# Altium PCB test.PcbDoc
Units mil, origin at the board's own origin, x right, y up, seen from the top; angles counter-clockwise.
Board outline 4300 x 3300 mil, 2 copper layers (Top Layer, Bottom Layer); 29 components, 76 nets, 195 pads, 29 vias.
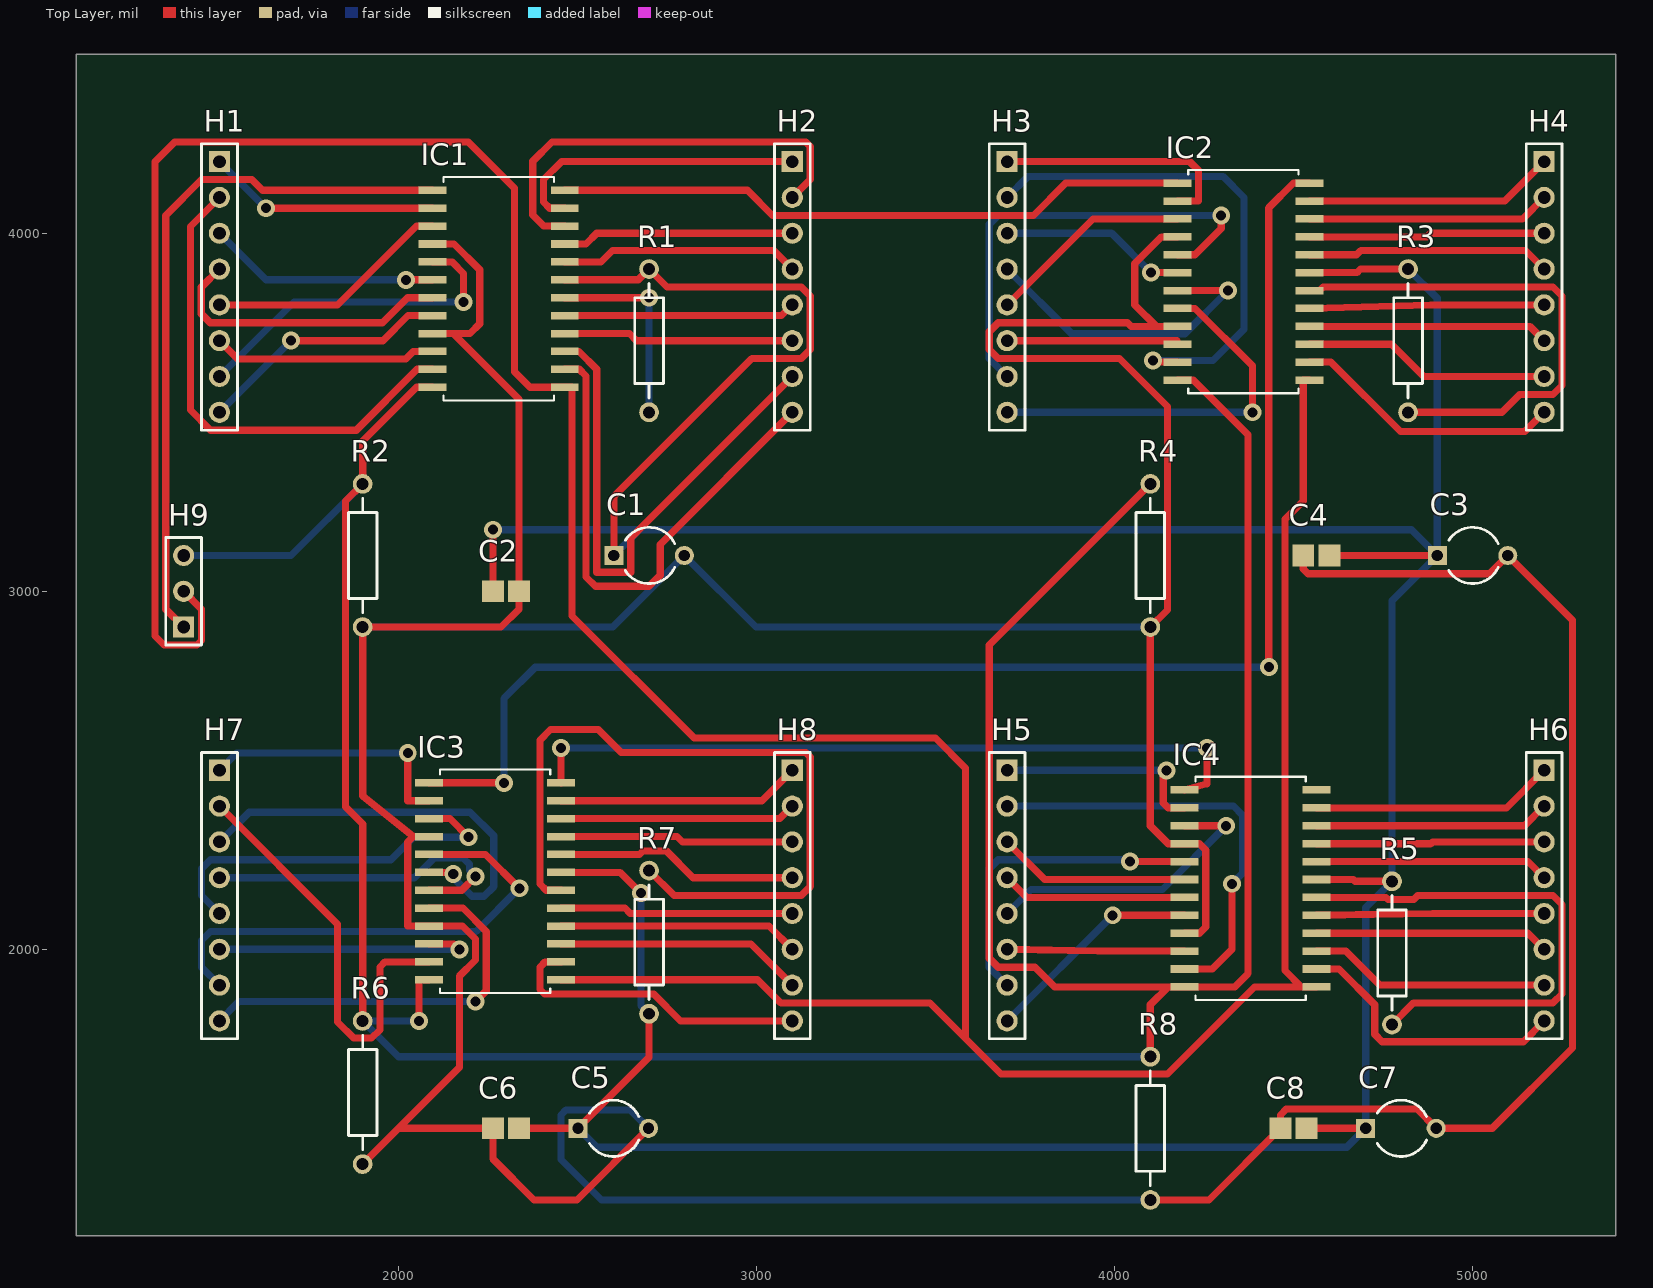
[diagram p0: Top Layer view]
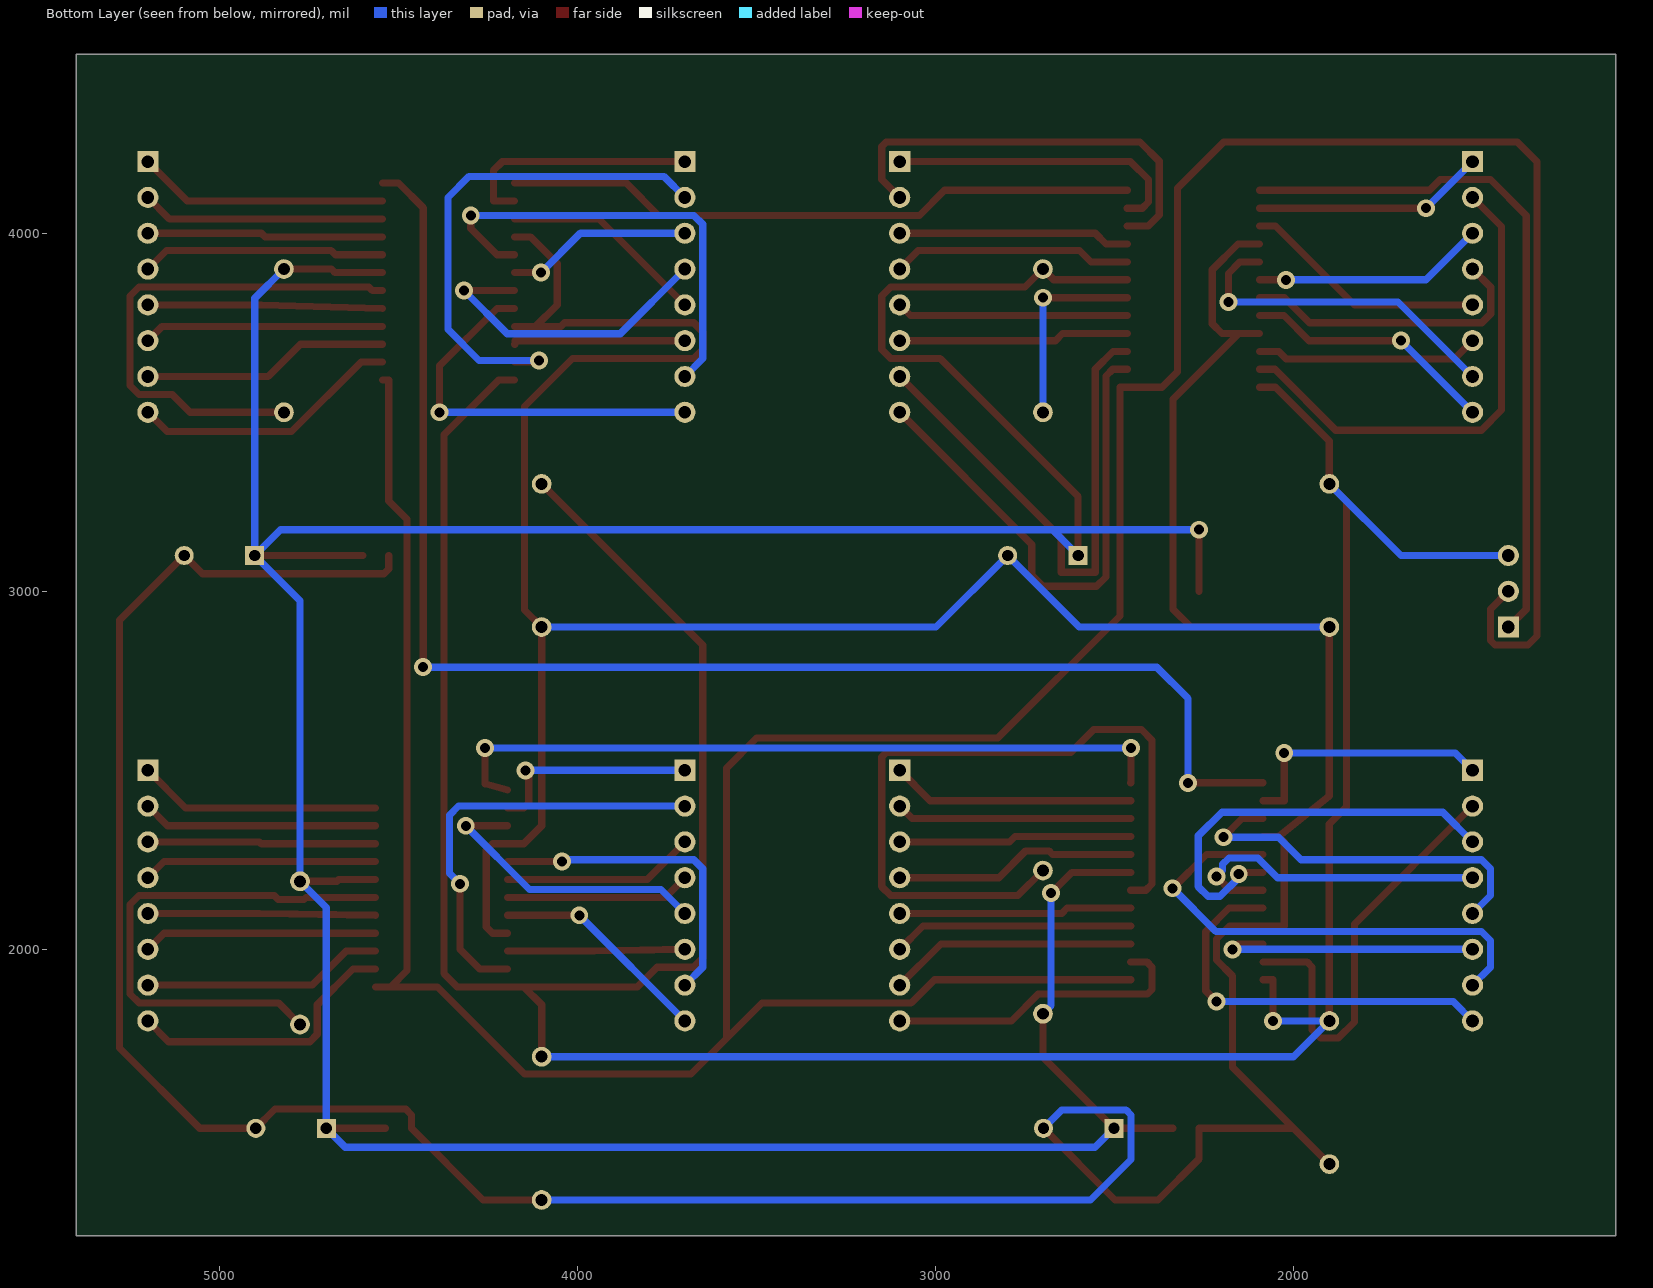
[diagram p1: Bottom Layer view, seen from below]

## Layer stack, top to bottom
Top Solder: solder mask 0.4, Solder Resist, Dk 3.5
Top Layer: signal copper 1.4
Dielectric 1: dielectric 12.6, FR-4, Dk 4.8
Bottom Layer: signal copper 1.4
Bottom Solder: solder mask 0.4, Solder Resist, Dk 3.5

## Board outline
1100,1200 5400,1200 5400,4500 1100,4500

## Design rules (kind name [scope] priority, off if disabled: settings)
Clearance [All] p1: gap=10 ignorepadtopadclearanceinfootprint=FALSE except(0: Arc-Hole Track-Hole SMDPad-Hole THPad-Hole Via-Hole Fill-Hole Poly-Hole Region-Hole Text-Hole)
PolygonConnect [All] p1: connectstyle=Relief reliefconductorwidth=10 reliefentries=4 polygonreliefangle="90 Angle" airgapwidth=10
RoutingVias [All] p1: holewidth=28 width=50 viastyle="Through Hole" minholewidth=28 minwidth=50 maxholewidth=28 maxwidth=50
SolderMaskExpansion [All] p1: expansion=4 istentingtop=FALSE
Width [All] p1: maxlimit=20 minlimit=15 preferedwidth=20 minimp=50.000000 maximp=50.000000 favimp=50.000000
30 further rules are at their usual default settings.

## Components (designator, comment, footprint, x,y, rotation, side; value= is the part's Value field where it differs from the comment)
C1 "Cap2" CAPR5-4X5 2700,3100 r0 top value=10µF
C2 "0.1µF" CAPC2013X94X50ML20T25 2300,3000 r0 top
C3 "Cap2" CAPR5-4X5 5000,3100 r0 top value=10µF
C4 "0.1µF" CAPC2013X94X50ML20T25 4563.58,3100 r0 top
C5 "Cap2" CAPR5-4X5 2600,1500 r0 top value=10µF
C6 "0.1µF" CAPC2013X94X50ML20T25 2300,1500 r0 top
C7 "Cap2" CAPR5-4X5 4800,1500 r0 top value=10µF
C8 "0.1µF" CAPC2013X94X50ML20T25 4500,1500 r0 top
H1 "Header 8" HDR1X8 1500,4200 r270 top
H2 "Header 8" HDR1X8 3100,4200 r270 top
H3 "Header 8" HDR1X8 3700,4200 r270 top
H4 "Header 8" HDR1X8 5200,4200 r270 top
H5 "Header 8" HDR1X8 3700,2500 r270 top
H6 "Header 8" HDR1X8 5200,2500 r270 top
H7 "Header 8" HDR1X8 1500,2500 r270 top
H8 "Header 8" HDR1X8 3100,2500 r270 top
H9 "Header 3" HDR1X3 1400,2900 r90 top
IC1 "MAX" *21-0042B_24 2280,3845 r0 top
IC2 "MAX" *21-0042B_24 4360,3865 r0 top
IC3 "MAX" *21-0042B_24 2270,2190 r0 top
IC4 "MAX" *21-0042B_24 4380,2170 r0 top
R1 "Res2" AXIAL-0.4 2700,3700 r90 top value=27K
R2 "Res2" AXIAL-0.4 1900,3100 r90 top value=10K
R3 "Res2" AXIAL-0.4 4820,3700 r90 top value=27K
R4 "Res2" AXIAL-0.4 4100,3100 r90 top value=10K
R5 "Res2" AXIAL-0.4 4775,1990 r90 top value=27K
R6 "Res2" AXIAL-0.4 1900,1600 r90 top value=10K
R7 "Res2" AXIAL-0.4 2700,2020 r90 top value=27K
R8 "Res2" AXIAL-0.4 4100,1500 r90 top value=10K

## Footprints (in the part's own frame and the unit in brackets; to place one, negate y for a bottom-side part, rotate by r counter-clockwise, add the part's x,y. Pads: shape width x height; smd on the part's side, far side on the other; paste and mask are expansions set on the pad)
*21-0042B_24 [mil]
  rect 78x21 smd: 1(-184.5,275) 2(-184.5,225) 3(-184.5,175) 4(-184.5,125) 5(-184.5,75) 6(-184.5,25) 7(-184.5,-25) 8(-184.5,-75) 9(-184.5,-125) 10(-184.5,-175) 11(-184.5,-225) 12(-184.5,-275) 13(184.5,-275) 14(184.5,-225) 15(184.5,-175) 16(184.5,-125) 17(184.5,-75) 18(184.5,-25) 19(184.5,25) 20(184.5,75) 21(184.5,125) 22(184.5,175) 23(184.5,225) 24(184.5,275)
  silkscreen extent -154,-312 154,312
AXIAL-0.4 [mm] "Axial Device, Thru-Hole; 2 Leads; 0.4 in Pin Spacing"
  round 1.4 hole 0.85: 1(-5.08,0) 2(5.08,0)
  silkscreen extent -4.06,-1.02 4.06,1.02
CAPC2013X94X50ML20T25 [mm] "Chip Capacitor, 2-Leads, Body 2.01x1.25mm, IPC Low Density"
  rect 1.55x1.55 smd: 1(-0.925,0) 2(0.925,0)
  body extent -1.1,-0.72 1.11,0.72, height 0.94
CAPR5-4X5 [mm] "Capacitor; 2 Leads"
  rect 1.35x1.35 hole 0.8: 1(-2.5,0)
  round 1.35 hole 0.8: 2(2.5,0)
  silkscreen extent -1.69,-2 1.82,2
HDR1X3 [mm] "Connector; Header; 3 Position"
  rect 1.5x1.5 hole 0.9: 1(0,0)
  round 1.5 hole 0.9: 2(2.54,0) 3(5.08,0)
  silkscreen extent -1.27,-1.27 6.35,1.27
HDR1X8 [mm] "Connector; Header; 8 Position"
  rect 1.5x1.5 hole 0.9: 1(0,0)
  round 1.5 hole 0.9: 2(2.54,0) 3(5.08,0) 4(7.62,0) 5(10.16,0) 6(12.7,0) 7(15.24,0) 8(17.78,0)
  silkscreen extent -1.27,-1.27 19.05,1.27

## Part data
C1 C3 C5 C7: "Capacitor", PackageDescription="Capacitor; 2 Leads", PackageReference=CAPR5-4X5, Published=23-Sep-2002, Publisher="Altium Limited"
C2 C4 C6 C8: library part CMP-2000-05016-1, "Chip Capacitor, Ceramic, 0.1 uF, 10%, 50 V, 0805, RoHS, Tape and Reel", Capacitance=100nF, Case Size/Dimension=0805, Dielectric=X7R, Manufacturer=AVX, Rated Voltage=50V, Tolerance (%)=±10%, Datasheet URL=http://www.farnell.com/datasheets/319609.pdf, Datasheet Version=Sep-07, Manufacturer URL=http://www.avx.com/
H1 H2 H3 H4 H5 H6 H7 H8: "Header, 8-Pin", LatestRevisionDate=17-Jul-2002, LatestRevisionNote="Re-released for DXP Platform.", Publisher="Altium Limited"
H9: "Header, 3-Pin", LatestRevisionDate=17-Jul-2002, LatestRevisionNote="Re-released for DXP Platform.", Publisher="Altium Limited"
R1 R2 R3 R4 R5 R6 R7 R8: "Resistor", LatestRevisionDate=17-Jul-2002, LatestRevisionNote="Re-released for DXP Platform.", PackageDescription="Axial Device, Thru-Hole; 2 Leads; 0.4 in Pin Spacing", PackageReference=AXIAL-0.4, Published=8-Jun-2000, Publisher="Altium Limited"

## Via types
v1: diameter 50, hole 28, Top Layer to Bottom Layer, 29 vias

## Nets (pads, with @x,y where several pads share a name; then routed paths per layer and width w, separated by ;. In a path a pad name is that pad's centre, name@x,y a point inside that pad or via, vN(x,y) a via of type N, cw(c..) or ccw(c..) an arc to the next point about the centre after c; other vN are vias at no path point)
+5: C1.1 C2.1 C3.1 C4.2 C5.1 C6.2 C7.1 C8.2 IC1.19 IC2.19 IC3.19 IC4.19 R1.2 R3.2 R5.2 R7.1 | length 11583.3
  Top Layer w20: C2.1 v1(2263.58,3172) ; C6.2 C5.1 2700,1698.43 R7.1 ; IC3.19 2619,2215 v1(2677,2157) ; IC1.19 2670,3870 R1.2 2750,3850 3125,3850 3150,3825 3150,3675 3125,3650 2987,3650 2601.57,3264.57 C1.1 ; C8.2 C7.1 ; IC2.19 4677,3890 4687,3900 R3.2 ; IC4.19 4667,2195 4672,2190 R5.2 ; C4.2 C3.1
  Bottom Layer w20: v1(2263.58,3172) 2673.57,3172 ; C5.1 2554.31,1447.26 4648.84,1447.26 C7.1 4701.57,2116.57 R5.2 4775,2973.43 C3.1 ; C1.1 2673.57,3172 ; v1(2677,2157) 2677,1843 R7.1 ; R3.2 4901.57,3818.43 C3.1 ; 2673.57,3172 4829.57,3172 C3.1
GND: C1.2 C2.2 C3.2 C4.1 C5.2 C6.1 C7.2 C8.1 IC1.4 IC1.9 IC2.4 IC2.9 IC3.4 IC3.9 IC4.4 IC4.9 R2.1 R4.1 R6.1 R8.1 | length 15710.5
  Top Layer w20: R6.1 2000,1500 ; IC3.4 2041,2315 ; IC1.9 2153,3720 ; IC1.4 2155,3970 2227,3898 2227,3747 2200,3720 2153,3720 ; C5.2 2498.43,1300 2378.43,1300 2263.58,1414.84 C6.1 2000,1500 ; R8.1 4263.58,1300 C8.1 4463.58,1537.5 4479.66,1553.58 4844.84,1553.58 C7.2 5055,1500 5279.53,1724.53 5279.53,2918.9 C3.2 5047.43,3049 4540.5,3049 4527.17,3062.33 C4.1 ; IC2.9 4116.5,3740 ; IC2.4 4131,3990 4056.5,3915.5 4056.5,3800 4116.5,3740 ; IC4.9 4237.5,2045 4255,2062.5 4255,2277.5 4237.5,2295 IC4.4 4150,2295 4100,2345 R4.1 4148,2948 4148,3516 4014,3650 3675,3650 3650,3675 3650,3725 3675,3750 4036,3750 4046,3740 4116.5,3740 ; 2000,1500 2170,1670 2170,1925 2215,1970 2215,2029 2179,2065 IC3.9 2026,2065 2026,2300 2041,2315 ; 2041,2315 1900,2428 R2.1 2286.42,2900 2336.42,2950 C2.2 2336.42,3536.58 2153,3720
  Bottom Layer w20: R2.1 2598.43,2900 C1.2 2998.43,2900 R4.1 ; C5.2 2647.43,1551 2467.5,1551 2454,1537.5 2454,1413 2567,1300 R8.1
NetH2_1: H2.1 IC1.23 | length 845
  Top Layer w20: IC1.23 2422.5,4070 2405,4087.5 2405,4150 2455,4200 H2.1
NetH2_2: H2.2 IC1.22 | length 1218.1
  Top Layer w20: IC1.22 2406,4020 2375,4051 2375,4201 2429,4255 3137.5,4255 3150,4242.5 3150,4150 H2.2
NetH2_3: H2.3 IC1.21 | length 647.9
  Top Layer w20: IC1.21 2524,3970 2554,4000 H2.3
NetH2_4: H2.4 IC1.20 | length 670.3
  Top Layer w20: IC1.20 2566,3920 2598,3952 3048,3952 H2.4
NetH2_5: H2.5 IC1.17 | length 647.9
  Top Layer w20: IC1.17 3070,3770 H2.5
NetH2_6: H2.6 IC1.16 | length 643.8
  Top Layer w20: IC1.16 2645.2,3720 2665.2,3700 H2.6
NetH2_7: H2.7 IC1.15 | length 1506
  Top Layer w20: IC1.15 2504,3670 2554,3620 2554,3053 2649,3053 2649,3149 H2.7
NetH2_8: H2.8 IC1.14 | length 1466.8
  Top Layer w20: IC1.14 2505,3620 2524,3601 2524,3040 2550,3014 2700,3014 2731,3045 2731,3131 H2.8
NetH4_1: H4.1 IC2.23 | length 701.1
  Top Layer w20: IC2.23 5090,4090 H4.1
NetH4_2: H4.2 IC2.22 | length 680.4
  Top Layer w20: IC2.22 5140,4040 H4.2
NetH4_3: H4.3 IC2.21 | length 659.6
  Top Layer w20: IC2.21 4873,3990 4883,4000 H4.3
NetH4_4: H4.4 IC2.20 | length 682
  Top Layer w20: IC2.20 4676,3940 4688,3952 5148,3952 H4.4
NetH4_5: H4.5 IC2.17 | length 655.6
  Top Layer w20: IC2.17 4883,3800 H4.5
NetH4_6: H4.6 IC2.16 | length 672.1
  Top Layer w20: IC2.16 5160,3740 H4.6
NetH4_7: H4.7 IC2.15 | length 692.8
  Top Layer w20: IC2.15 4774,3690 4864,3600 H4.7
NetH4_8: H4.8 IC2.14 | length 758.2
  Top Layer w20: IC2.14 4605,3640 4799,3446 5146,3446 H4.8
NetH6_1: H6.1 IC4.23 | length 679
  Top Layer w20: IC4.23 5095,2395 H6.1
NetH6_2: H6.2 IC4.22 | length 658.3
  Top Layer w20: IC4.22 5145,2345 H6.2
NetH6_3: H6.3 IC4.21 | length 637.6
  Top Layer w20: IC4.21 4883,2295 4888,2300 H6.3
NetH6_4: H6.4 IC4.20 | length 654.1
  Top Layer w20: IC4.20 5155,2245 H6.4
NetH6_5: H6.5 IC4.17 | length 635.5
  Top Layer w20: IC4.17 4888,2100 H6.5
NetH6_6: H6.6 IC4.16 | length 654.1
  Top Layer w20: IC4.16 5155,2045 H6.6
NetH6_7: H6.7 IC4.15 | length 674.9
  Top Layer w20: IC4.15 4646,1995 4741,1900 H6.7
NetH6_8: H6.8 IC4.14 | length 791.9
  Top Layer w20: IC4.14 4627,1945 4727,1845 4727,1762.5 4747.5,1742 5142,1742 H6.8
NetH8_1: H8.1 IC3.23 | length 680.7
  Top Layer w20: IC3.23 3015,2415 H8.1
NetH8_2: H8.2 IC3.22 | length 660
  Top Layer w20: IC3.22 3065,2365 H8.2
NetH8_3: H8.3 IC3.21 | length 651.7
  Top Layer w20: IC3.21 2778,2315 2793,2300 H8.3
NetH8_4: H8.4 IC3.20 | length 680.7
  Top Layer w20: IC3.20 2673,2265 2683,2275 2748,2275 2823,2200 H8.4
NetH8_5: H8.5 IC3.17 | length 651.7
  Top Layer w20: IC3.17 2632.37,2115 2647.37,2100 H8.5
NetH8_6: H8.6 IC3.16 | length 672.4
  Top Layer w20: IC3.16 3035,2065 H8.6
NetH8_7: H8.7 IC3.15 | length 693.1
  Top Layer w20: IC3.15 2985,2015 H8.7
NetH8_8: H8.8 IC3.14 | length 869.5
  Top Layer w20: IC3.14 2410,1965 2395,1950 2395,1887.5 2407.5,1875 2713,1875 2788,1800 H8.8
NetH9_1: H9.1 IC1.1 | length 1970.1
  Top Layer w20: H9.1 1350,2950 1350,4050 1450,4150 1590,4150 1620,4120 IC1.1
NetH9_2: H9.2 IC1.13 IC2.13 IC3.13 IC4.13 | length 10141.9
  Top Layer w20: H9.2 1450,2950 1450,2862.5 1437.5,2850 1345,2850 1320,2875 1320,4200 1375,4255 2195,4255 2324,4126 2324,3613 2367,3570 IC1.13 2485,3570 2485,2931 2826,2590 3500,2590 3584,2506 3584,1751 ; IC3.13 3003,1915 3068,1850 3485,1850 3584,1751 ; IC2.13 4527,3590 4527,3252 4476,3201 4476,1940.5 4521.5,1895 ; IC4.13 4521.5,1895 ; 3584,1751 3683,1652 4148,1652 4391,1895 4521.5,1895
NetH9_3: H9.3 IC1.12 IC2.12 IC3.12 IC4.12 R2.2 R4.2 R6.2 R8.2 | length 9306.6
  Top Layer w20: R6.2 1900,2350 1852,2398 1852,3252 R2.2 1900,3420 2050,3570 IC1.12 ; v1(2057,1800) 2057,1915 IC3.12 ; R8.2 4100,1845 4150,1895 ; R4.2 3650,2850 3650,1975 3675,1950 3778,1950 3833,1895 4150,1895 ; IC2.12 4220,3590 4373,3437 4373,1932 4336,1895 IC4.12 4150,1895
  Bottom Layer w20: H9.3 1700,3100 R2.2 ; v1(2057,1800) R6.2 2000,1700 R8.2
NetIC1_18: IC1.18 R1.1 | length 555.5
  Top Layer w20: IC1.18 v1(2700,3820)
  Bottom Layer w20: R1.1 v1(2700,3820)
NetIC1_24: IC1.24 IC2.1 | length 1777.3
  Top Layer w20: IC1.24 2975,4120 3045,4050 3774,4050 3864,4140 IC2.1
NetIC2_18: IC2.18 R3.1 | length 1431.1
  Top Layer w20: IC2.18 4573,3840 4583,3850 5225,3850 5250,3825 5250,3575 5225,3550 5132,3550 5082,3500 R3.1
NetIC2_24: IC2.24 IC3.1 | length 4042.6
  Top Layer w20: IC3.1 v1(2295,2465) ; v1(4431,2788) 4431,4071 4500,4140 IC2.24
  Bottom Layer w20: v1(2295,2465) 2295,2701 2382,2788 v1(4431,2788)
NetIC3_18: IC3.18 R7.2 | length 2119.2
  Top Layer w20: IC3.18 2412.5,2165 2395,2182.5 2395,2584 2425,2614 2558,2614 2622,2550 3137.5,2550 3150,2537.5 3150,2175 3125,2150 2770,2150 R7.2
NetIC3_24: IC3.24 IC4.1 | length 2065.9
  Top Layer w20: v1(2454,2562) 2454,2465 IC3.24 ; IC4.1 4258,2462.5 v1(4258,2562)
  Bottom Layer w20: v1(2454,2562) v1(4258,2562)
NetIC4_18: IC4.18 R5.1 | length 1462.2
  Top Layer w20: IC4.18 4758,2145 4764,2139 4836,2139 4847,2150 5224.53,2150 5249.53,2125 5249.53,1875 5225,1850.47 4835.47,1850.47 R5.1
S0: H1.1 IC1.2 | length 649.3
  Top Layer w20: v1(1630,4070) IC1.2
  Bottom Layer w20: H1.1 v1(1630,4070)
S1: H1.5 IC1.3 | length 686.6
  Top Layer w20: H1.5 1830,3800 2050,4020 IC1.3
S2: H1.7 IC1.5 | length 947.9
  Top Layer w20: IC1.5 2150,3920 2182,3888 v1(2182,3808)
  Bottom Layer w20: H1.7 1708,3808 v1(2182,3808)
S3: H1.3 IC1.6 | length 649.3
  Top Layer w20: v1(2021,3870) IC1.6
  Bottom Layer w20: H1.3 1630,3870 v1(2021,3870)
S4: H1.4 IC1.7 | length 832
  Top Layer w20: H1.4 1449,3849 1449,3775 1474,3750 1955,3750 2025,3820 IC1.7
S5: H1.8 IC1.8 | length 707.3
  Top Layer w20: v1(1700,3700) 1957,3700 2027,3770 IC1.8
  Bottom Layer w20: H1.8 v1(1700,3700)
S6: H1.6 IC1.10 | length 625.2
  Top Layer w20: H1.6 1550.81,3649.19 2020.25,3649.19 2041.06,3670 IC1.10
S7: H1.2 IC1.11 | length 1397.7
  Top Layer w20: H1.2 1419,4019 1419,3506 1475,3450 1882,3450 2052,3620 IC1.11
S8: H3.1 IC2.2 | length 689.9
  Top Layer w20: H3.1 4210,4200 4235,4175 4235,4090 IC2.2
S9: H3.5 IC2.3 | length 574.9
  Top Layer w20: H3.5 3940,4040 IC2.3
S10: H3.7 IC2.5 | length 1293.8
  Top Layer w20: IC2.5 4225,3940 4298,4013 v1(4298,4050)
  Bottom Layer w20: H3.7 3650,3650 3650,4025 3675,4050 v1(4298,4050)
S11: H3.3 IC2.6 | length 521.1
  Top Layer w20: v1(4102,3890) IC2.6
  Bottom Layer w20: H3.3 3992,4000 v1(4102,3890)
S12: H3.4 IC2.7 | length 883.4
  Top Layer w20: IC2.7 v1(4317,3840)
  Bottom Layer w20: H3.4 3880.76,3719.24 4196.24,3719.24 v1(4317,3840)
S13: H3.8 IC2.8 | length 1090.8
  Top Layer w20: IC2.8 4225,3790 4385,3630 v1(4385,3500)
  Bottom Layer w20: H3.8 v1(4385,3500)
S14: H3.6 IC2.10 | length 485.5
  Top Layer w20: H3.6 4174.48,3700 4174.48,3690 IC2.10
S15: H3.2 IC2.11 | length 1438.5
  Top Layer w20: v1(4108,3645) 4113,3640 IC2.11
  Bottom Layer w20: H3.2 3759,4159 4303,4159 4362,4100 4362,3732 4275,3645 v1(4108,3645)
S16: H5.1 IC4.2 | length 604.4
  Top Layer w20: v1(4145,2499) 4136,2490 4136,2409 4150,2395 IC4.2
  Bottom Layer w20: H5.1 4144,2500 v1(4145,2499)
S17: H5.5 IC4.3 | length 830
  Top Layer w20: IC4.3 v1(4312,2345)
  Bottom Layer w20: H5.5 3767,2167 4134,2167 v1(4312,2345)
S18: H5.7 IC4.5 | length 903.6
  Top Layer w20: v1(4043,2245) IC4.5
  Bottom Layer w20: H5.7 3650,1950 3650,2225 3675,2250 4038,2250 v1(4043,2245)
S19: H5.3 IC4.6 | length 539
  Top Layer w20: H5.3 3805,2195 IC4.6
S20: H5.4 IC4.7 | length 518.3
  Top Layer w20: H5.4 3755,2145 IC4.7
S21: H5.8 IC4.8 | length 617.7
  Top Layer w20: v1(3995,2095) IC4.8
  Bottom Layer w20: H5.8 v1(3995,2095)
S22: H5.6 IC4.10 | length 495.5
  Top Layer w20: H5.6 3952,1995 IC4.10
S23: H5.2 IC4.11 | length 1209.6
  Top Layer w20: IC4.11 4273,1945 4328,2000 v1(4328,2183)
  Bottom Layer w20: H5.2 4332,2400 4357,2375 4357,2212 v1(4328,2183)
S24: H7.1 IC3.2 | length 738.4
  Top Layer w20: v1(2026,2548) 2026,2415 IC3.2
  Bottom Layer w20: H7.1 1548,2548 v1(2026,2548)
S25: H7.5 IC3.3 | length 1060
  Top Layer w20: IC3.3 2144,2365 v1(2195.9,2313.1)
  Bottom Layer w20: H7.5 1450,2150 1450,2225 1475,2250 1979.1,2250 2042.2,2313.1 v1(2195.9,2313.1)
S26: H7.7 IC3.5 | length 1384.6
  Top Layer w20: IC3.5 2243,2265 v1(2337.5,2170.5)
  Bottom Layer w20: H7.7 1450,1950 1450,2025 1475,2050 2217,2050 v1(2337.5,2170.5)
S27: H7.3 IC3.6 | length 1195
  Top Layer w20: IC3.6 2148,2215 v1(2153,2210)
  Bottom Layer w20: H7.3 1583,2383 2200,2383 2266,2317 2266,2175 2239,2148 2205,2148 2153,2200 v1(2153,2210)
S28: H7.4 IC3.7 | length 914.8
  Top Layer w20: IC3.7 2177,2165 v1(2215,2203)
  Bottom Layer w20: H7.4 2045,2200 2100,2255 2180.5,2255 2198,2237.5 2198,2220 v1(2215,2203)
S29: H7.8 IC3.8 | length 1132.2
  Top Layer w20: IC3.8 2180,2115 2245,2050 2245,1884 v1(2215,1854)
  Bottom Layer w20: H7.8 1554,1854 v1(2215,1854)
S30: H7.6 IC3.10 | length 760.7
  Top Layer w20: IC3.10 2155,2015 v1(2170,2000)
  Bottom Layer w20: H7.6 v1(2170,2000)
S31: H7.2 IC3.11 | length 1204.9
  Top Layer w20: H7.2 1830,2070 1830,1797 1875,1752 1925,1752 1948,1775 1948,1950.5 1962.5,1965 IC3.11
pads on no net: IC4.24